# Allegro board HY_BQ24090_V10.brd
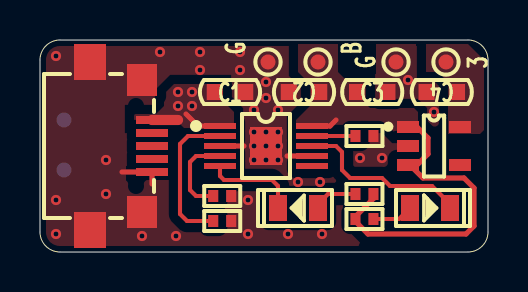
[diagram p0: board, top side]
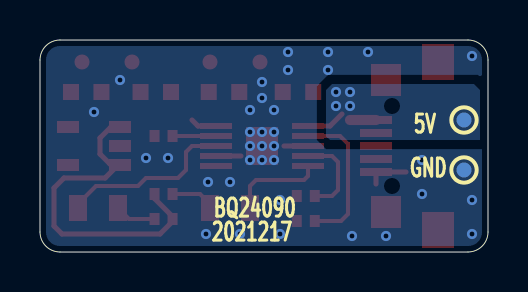
[diagram p1: board, bottom side, seen from below]

Outline 22.4 x 10.6 mm; copper layers: TOP, BOTTOM. Coordinates in mm from the lower left corner of the outline.
Outline path: 0,9.6 arc(0.29,10.31) 1,10.6 21.4,10.6 arc(22.11,10.31) 22.4,9.6 22.4,1 arc(22.11,0.29) 21.4,0 1,0 arc(0.29,0.29) 0,1 0,9.6

## Design rules (mm)
constraint set DEFAULT: min track width 0.203, pair gap 0.203

## Placement (name value [footprint] x y rotation side)
C1  10uF_10V  [C0603]  9.5 8 0 top
C2  10uF_10V  [C0603]  13.2 8 180 top
C3  10uF_10V  [C0603]  16.61 8 0 top
C4  10uF_10V  [C0603]  20.09 8 180 top
D1  RED_0805  [LED0805]  19.5 2.2 0 top
D2  GREEN_0805  [LED0805]  12.9 2.2 180 top
NOREF  -  []  0 0 0 top
NOREF#2  -  []  0 0 90 top
R1  10K  [R0402]  16.22 5.8 180 top
R2  510R  [R0402]  9.11 1.55 0 top
R3  2K  [R0402]  9.11 2.8 0 top
R4  4.7K  [R0402]  16.22 1.65 0 top
R5  4.7K  [R0402]  16.22 2.9 180 top
TP1  TestPoint  [TP-0R75]  1.2 6.6 180 bottom
TP2  TestPoint  [TP-0R75]  13.9 9.5 0 top
TP3  TestPoint  [TP-0R75]  17.8 9.5 0 top
TP4  TestPoint  [TP-0R75]  11.4 9.5 0 top
TP5  TestPoint  [TP-0R75]  20.3 9.5 0 top
TP6  TestPoint  [TP-0R75]  1.2 4.1 180 bottom
U1  BQ24090  [HVSSOP10]  11.3 5.3 270 top
U2  SPX3819M5-L-3-3/TR  [SOT23-5]  19.7 5.3 270 top
USB1  USB-MICRO  [USB-U-F-M5SS-W-1]  2.5 5.3 270 top

## Library data of the parts
C1-C4 = CAP NP_2
D1 D2 = LED_1
R1-R5 = R_Generic
TP1-TP6 = TestPoint
U1 = BQ24090
U2 = SPX3819M5-L-1-2
USB1 = USB-MICRO

## Footprints (pads in the part's own frame, mm; a bottom-side part is the same pattern mirrored in y, then rotated)
C0603
  rect 0.8x0.8 smd: 1(-0.762,0) 2(0.762,0)
HVSSOP10
  rect 0.3x1.6 smd: 1(-1,-2.3) 2(-0.5,-2.3) 3(0,-2.3) 4(0.5,-2.3) 5(1,-2.3) 6(1,2.3) 7(0.5,2.3) 8(0,2.3) 9(-0.5,2.3) 10(-1,2.3)
  rect 1.9x1.6 smd: 11(0,0)
LED0805
  rect 0.9x1.3 smd: 1(-1,0) 2(1,0)
R0402
  rect 0.5x0.6 smd: 1(-0.45,0) 2(0.45,0)
SOT23-5
  rect 0.6x1.1 smd: 1(-0.95,-1.3) 2(0,-1.3) 3(0.95,-1.3) 4(0.95,1.3) 5(-0.95,1.3)
TP-0R75
  round 0.75 smd: 1(0,0)
USB-U-F-M5SS-W-1
  rect 0.4x1.6 smd: 1(-1.3,3.1) 2(-0.65,3.1) 3(0,3.1) 4(0.65,3.1) 5(1.3,3.1)
  rect 1.6x1.5 smd: 6(-3.3,2.6) 7(3.3,2.6)
  rect 1.8x1.6 smd: 8(-4.2,0) 9(4.2,0)

## Nets
GND: C1.2 C2.2 C3.2 C4.2 R1.1 R2.2 R3.2 TP3.1 TP4.1 TP6.1 U1.3(VSS) U1.7 U1.11 U2.2 USB1.5 USB1.6 USB1.7 USB1.8 USB1.9
VCC_3.3V: C4.1 TP5.1 U2.5(VOUT)
VCC_BAT_4.2V: C2.1 C3.1 R4.1 R5.1 TP2.1 U1.10 U2.1 U2.3
VCC_USB_5V: C1.1 TP1.1 U1.1 USB1.1(VBUS)
N17427711: R2.1 U1.2
N17429164: R3.1 U1.4
N17430183: D1.2(CATHODE) U1.8
N17430239: D2.2(CATHODE) U1.5
N17431162: R1.2 U1.9
N174292921: D1.1 R4.2
N174302151: D2.1 R5.2

Pads without a net: U1 6; U2 4; USB1 2 3 4

## Via types
v1: diameter 0.508, hole 0.254, TOP to BOTTOM, 39 vias

## Routing (per net, layer and track width the routed paths; a pad name or vN(x,y) marks a point on that pad's centre or on a via; arc(x,y) is an arc through that point)
GND: length 4.5
  TOP w0.254: U1.7 12.35,4.8 ; 4.1,4 USB1.5 5.6,3.4 ; U1.3 10.2,5.3
  vias: v1(0.8,9.8) v1(0.8,2.6) v1(0.8,0.9) v1(3.3,4.6) v1(3.3,2.9) v1(5.1,0.8) v1(6,10) v1(6.8,0.8) v1(8,10) v1(8,9.1) v1(10,10) v1(10,9.1) v1(10.4,2.6) v1(10.4,0.9) v1(10.7,7.1) v1(10.7,6) v1(10.7,5.3) v1(10.7,4.6) v1(11.3,8.5) v1(11.3,7.7) v1(11.3,6) v1(11.3,5.3) v1(11.3,4.6) v1(11.9,7.1) v1(11.9,6) v1(11.9,5.3) v1(11.9,4.6) v1(12.4,0.9) v1(12.9,3.5) v1(14,3.5) v1(14.1,0.9) v1(16,4.7) v1(17.1,4.7) v1(18.4,8.6) v1(19.7,7)
VCC_BAT_4.2V: length 18.3
  TOP w0.254: 18.45,4.4 18.9,4.4 19.4,4.9 19.4,5.7 18.85,6.25 U2.1 ; 18.45,4.4 19.15,3.7 21.2,3.7 21.7,3.2 21.7,1.3 21.3,0.9 16.4,0.9 15.77,1.53 R4.1 15.77,1.77 16.67,2.67 R5.1 ; 18.45,4.4 U2.3 ; U1.10 14.5,6.3 14.8,6.6
VCC_USB_5V: length 3.2
  TOP w0.254: U1.1 7.9,6.3 7.3,6.9
  TOP w0.508: USB1.1 6.9,6.6
  vias: v1(6.9,8) v1(6.9,7.3) v1(7.6,8) v1(7.6,7.3)
N17427711: length 7.5
  TOP w0.203: U1.2 7.4,5.8 7,5.4 7,1.9 7.35,1.55 8.66,1.55
N17429164: length 4.3
  TOP w0.203: U1.4 7.8,4.8 7.5,4.5 7.5,3.1 7.8,2.8 8.66,2.8
N17430183: length 8.8
  TOP w0.203: U1.8 14.8,5.3 15.1,5 15.1,4.1 15.5,3.7 17.1,3.7 17.5,3.3 19.6,3.3 20.5,2.4 D1.2
N17430239: length 4.7
  TOP w0.203: U1.5 9,3.8 9.2,3.6 11.6,3.6 11.9,3.3 D2.2
N17431162: length 2.2
  TOP w0.203: U1.9 R1.2
N174292921: length 2.1
  TOP w0.203: D1.1 17.95,1.65 R4.2
N174302151: length 2.3
  TOP w0.203: R5.2 14.4,2.9 13.9,2.4 D2.1

## Copper pours and planes (outline as drawn; the poured copper is in the pictures)
GND on TOP: 16.8,10.4 18.8,10.4 18.8,10.3 21.4,10.3 21.89,10.09 22.1,9.6 22.1,1 21.89,0.51 21.4,0.3 1,0.3 0.51,0.51 0.3,1 0.3,9.6 0.51,10.09 1,10.3 15.3,10.3 15.3,8.9 16.8,8.9 ; 2 cut-outs
GND on BOTTOM: 0.3,9.6 0.51,10.09 1,10.3 21.4,10.3 21.89,10.09 22.1,9.6 22.1,1 21.89,0.51 21.4,0.3 1,0.3 0.51,0.51 0.3,1
VCC_3.3V on TOP: 20.4,5.9 22,5.9 22.2,6.1 22.2,9.6 21.4,10.4 19.3,10.4 19.3,9 19.9,9 20.4,8.5
VCC_BAT_4.2V on TOP: 12.8,6.1 14.9,6.1 15.2,6.4 17.3,6.4 17.8,5.9 18.9,5.9 18.9,7 18.7,7.2 16.5,7.2 16.3,7.4 16.3,8.5 15.4,8.5 14.9,9 14.9,10.4 12.9,10.4 12.9,9 13.5,8.4 13.5,7.3 12.8,6.6
VCC_USB_5V on TOP: 4.7,6.4 7,6.4 7.2,6.2 9.7,6.2 9.7,7 9.1,7.6 9.1,8.4 6.7,8.4 6.2,7.9 6.2,7.3 5.8,6.9 4.7,6.9
VCC_USB_5V on BOTTOM: 0.4,5.6 7.9,5.6 8.1,5.8 8.1,8.1 7.8,8.4 0.7,8.4 0.4,8.1

## Text on the board
Ref Des/Silkscreen Bottom: 5V | GND | BQ24090 | 2021217
Ref Des/Silkscreen Top: G | B | 3
DISPLAY_TOP: FIGURE | FINISHED_SIZE | 0.254 | DRILL CHART: TOP to BOTTOM | ALL UNITS ARE IN MILLIMETERS | PLATED | QTY | 39 | TOTAL HOLES:
